# Altium PCB PCB3.PcbDoc (part 3 of 3)
Units mil, origin at the board's own origin, x right, y up, seen from the top; angles counter-clockwise.
Board outline 3693.31 x 2873.7 mil, 2 copper layers (Top Layer, Bottom Layer); 240 components, 0 nets, 816 pads, 396 vias.
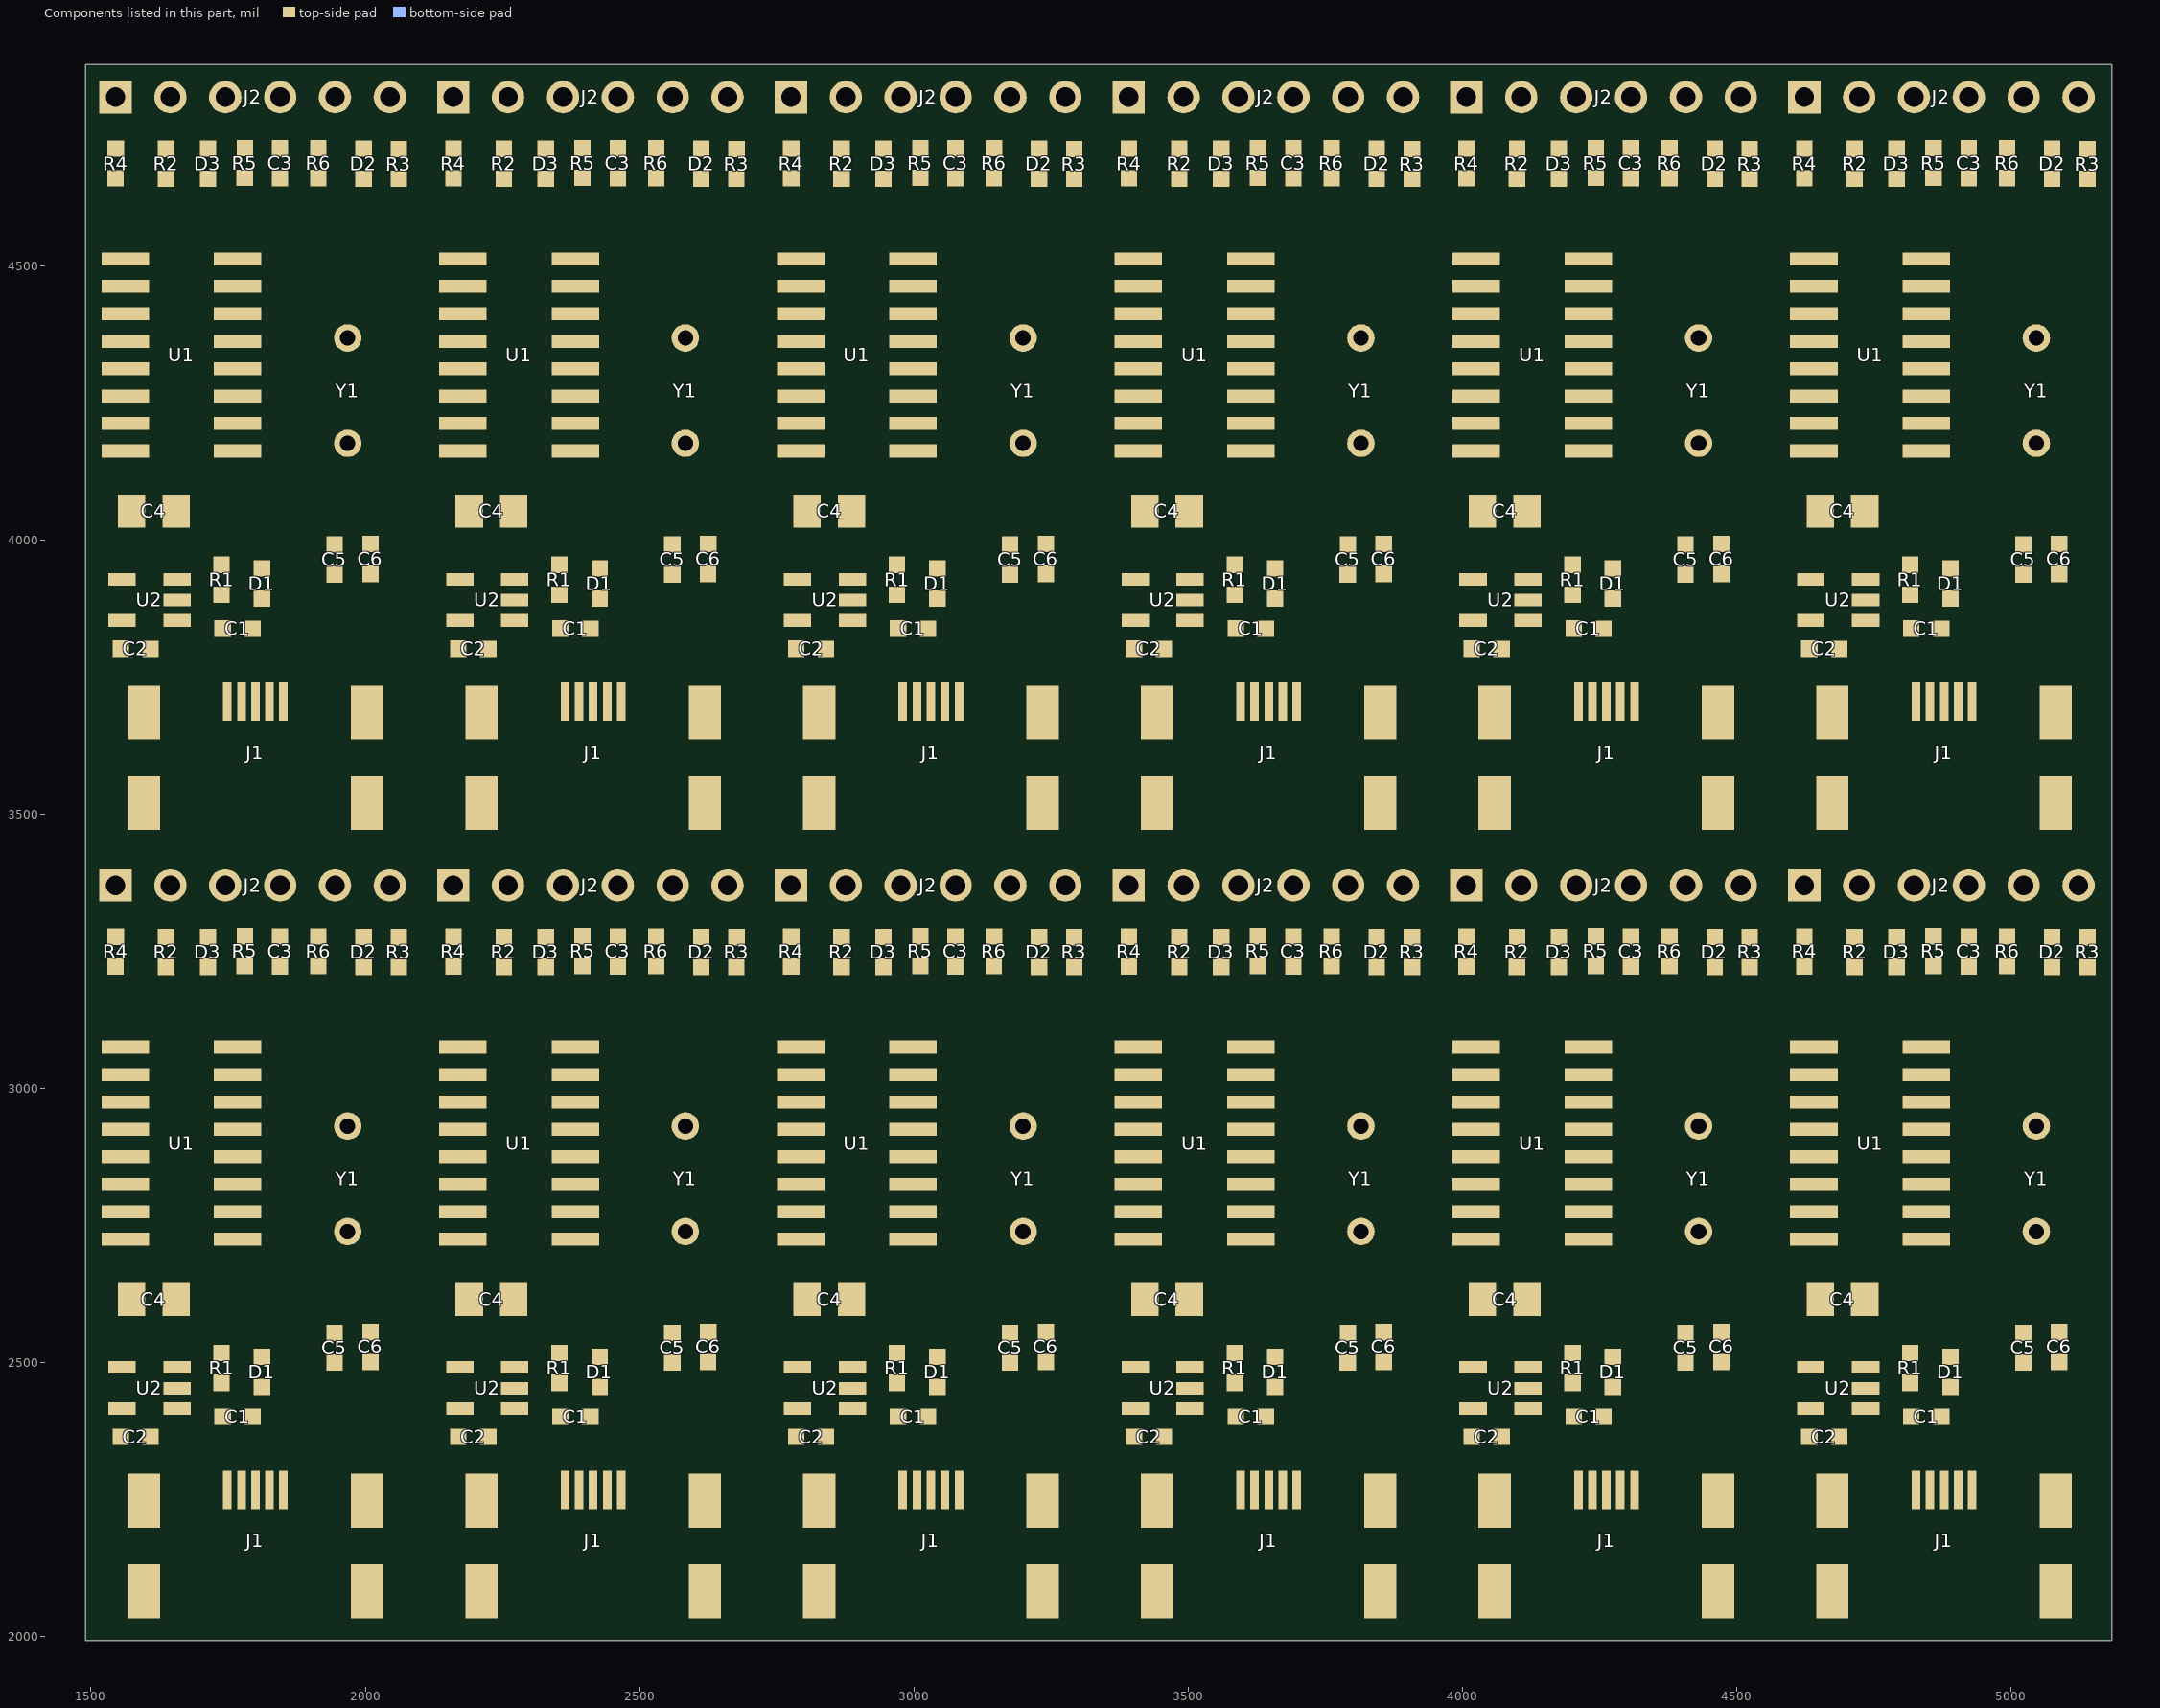
[diagram p3: the components of this part, seen from the top]

## Other copper
Top Layer:
  rectangle: 4727.94,2236.23 4832.44,2427.98
  rectangle: 4796.17,2383.93 4831.44,2480.2
  rectangle: 4112.39,2236.23 4216.89,2427.98
  rectangle: 4180.61,2383.93 4215.88,2480.2
  rectangle: 3496.84,2236.23 3601.34,2427.98
  rectangle: 3565.06,2383.93 3600.33,2480.2
  rectangle: 2881.29,2236.23 2985.78,2427.98
  rectangle: 2949.51,2383.93 2984.78,2480.2
  rectangle: 2265.74,2236.23 2370.23,2427.98
  rectangle: 2333.96,2383.93 2369.23,2480.2
  rectangle: 1650.18,2236.23 1754.68,2427.98
  rectangle: 1718.41,2383.93 1753.68,2480.2
  rectangle: 4727.94,3673.08 4832.44,3864.83
  rectangle: 4796.17,3820.78 4831.44,3917.05
  rectangle: 4112.39,3673.08 4216.89,3864.83
  rectangle: 4180.61,3820.78 4215.88,3917.05
  rectangle: 3496.84,3673.08 3601.34,3864.83
  rectangle: 3565.06,3820.78 3600.33,3917.05
  rectangle: 2881.29,3673.08 2985.78,3864.83
  rectangle: 2949.51,3820.78 2984.78,3917.05
  rectangle: 2265.74,3673.08 2370.23,3864.83
  rectangle: 2333.96,3820.78 2369.23,3917.05
  rectangle: 1650.18,3673.08 1754.68,3864.83
  rectangle: 1718.41,3820.78 1753.68,3917.05

## Silkscreen, mask and mechanical layers (free items; w line width, h text height)
Bottom Overlay:
  text "GND" at 2069.98,4746.78 h30
  text "GND" at 2685.53,4746.78 h30
  text "GND" at 3301.09,4746.78 h30
  text "GND" at 3916.64,4746.78 h30
  text "GND" at 4532.19,4746.78 h30
  text "GND" at 5147.74,4746.78 h30
  text "5V" at 1560.62,4745.68 h30
  text "RX" at 1960.57,4746.14 h30
  text "5V" at 2176.17,4745.68 h30
  text "RX" at 2576.13,4746.14 h30
  text "5V" at 2791.72,4745.68 h30
  text "RX" at 3191.68,4746.14 h30
  text "5V" at 3407.28,4745.68 h30
  text "RX" at 3807.23,4746.14 h30
  text "5V" at 4022.83,4745.68 h30
  text "RX" at 4422.78,4746.14 h30
  text "5V" at 4638.38,4745.68 h30
  text "RX" at 5038.33,4746.14 h30
  text "VCC" at 1669.07,4745.3 h30
  text "3V3" at 1765.25,4744.53 h30
  text "TX" at 1856.76,4745.44 h30
  text "VCC" at 2284.62,4745.3 h30
  text "3V3" at 2380.8,4744.53 h30
  text "TX" at 2472.31,4745.44 h30
  text "VCC" at 2900.17,4745.3 h30
  text "3V3" at 2996.35,4744.53 h30
  text "TX" at 3087.87,4745.44 h30
  text "VCC" at 3515.72,4745.3 h30
  text "3V3" at 3611.91,4744.53 h30
  text "TX" at 3703.42,4745.44 h30
  text "VCC" at 4131.27,4745.3 h30
  text "3V3" at 4227.46,4744.53 h30
  text "TX" at 4318.97,4745.44 h30
  text "VCC" at 4746.83,4745.3 h30
  text "3V3" at 4843.01,4744.53 h30
  text "TX" at 4934.52,4745.44 h30
  text "GND" at 2069.98,3309.93 h30
  text "GND" at 2685.53,3309.93 h30
  text "GND" at 3301.09,3309.93 h30
  text "GND" at 3916.64,3309.93 h30
  text "GND" at 4532.19,3309.93 h30
  text "GND" at 5147.74,3309.93 h30
  text "5V" at 1560.62,3308.84 h30
  text "TX" at 1856.76,3308.59 h30
  text "RX" at 1960.57,3309.29 h30
  text "5V" at 2176.17,3308.84 h30
  text "TX" at 2472.31,3308.59 h30
  text "RX" at 2576.13,3309.29 h30
  text "5V" at 2791.72,3308.84 h30
  text "TX" at 3087.87,3308.59 h30
  text "RX" at 3191.68,3309.29 h30
  text "5V" at 3407.28,3308.84 h30
  text "TX" at 3703.42,3308.59 h30
  text "RX" at 3807.23,3309.29 h30
  text "5V" at 4022.83,3308.84 h30
  text "TX" at 4318.97,3308.59 h30
  text "RX" at 4422.78,3309.29 h30
  text "5V" at 4638.38,3308.84 h30
  text "TX" at 4934.52,3308.59 h30
  text "RX" at 5038.33,3309.29 h30
  text "VCC" at 1669.07,3308.45 h30
  text "3V3" at 1765.25,3307.69 h30
  text "VCC" at 2284.62,3308.45 h30
  text "3V3" at 2380.8,3307.69 h30
  text "VCC" at 2900.17,3308.45 h30
  text "3V3" at 2996.35,3307.69 h30
  text "VCC" at 3515.72,3308.45 h30
  text "3V3" at 3611.91,3307.69 h30
  text "VCC" at 4131.27,3308.45 h30
  text "3V3" at 4227.46,3307.69 h30
  text "VCC" at 4746.83,3308.45 h30
  text "3V3" at 4843.01,3307.69 h30